# Altium PCB 接收端V02.PcbDoc
Units mil, origin at the board's own origin, x right, y up, seen from the top; angles counter-clockwise.
Board outline 3947.53 x 3949.03 mil, 2 copper layers (Top Layer, Bottom Layer); 78 components, 36 nets, 205 pads, 3 vias.
Unrouted connection lines stored in the file: 2.
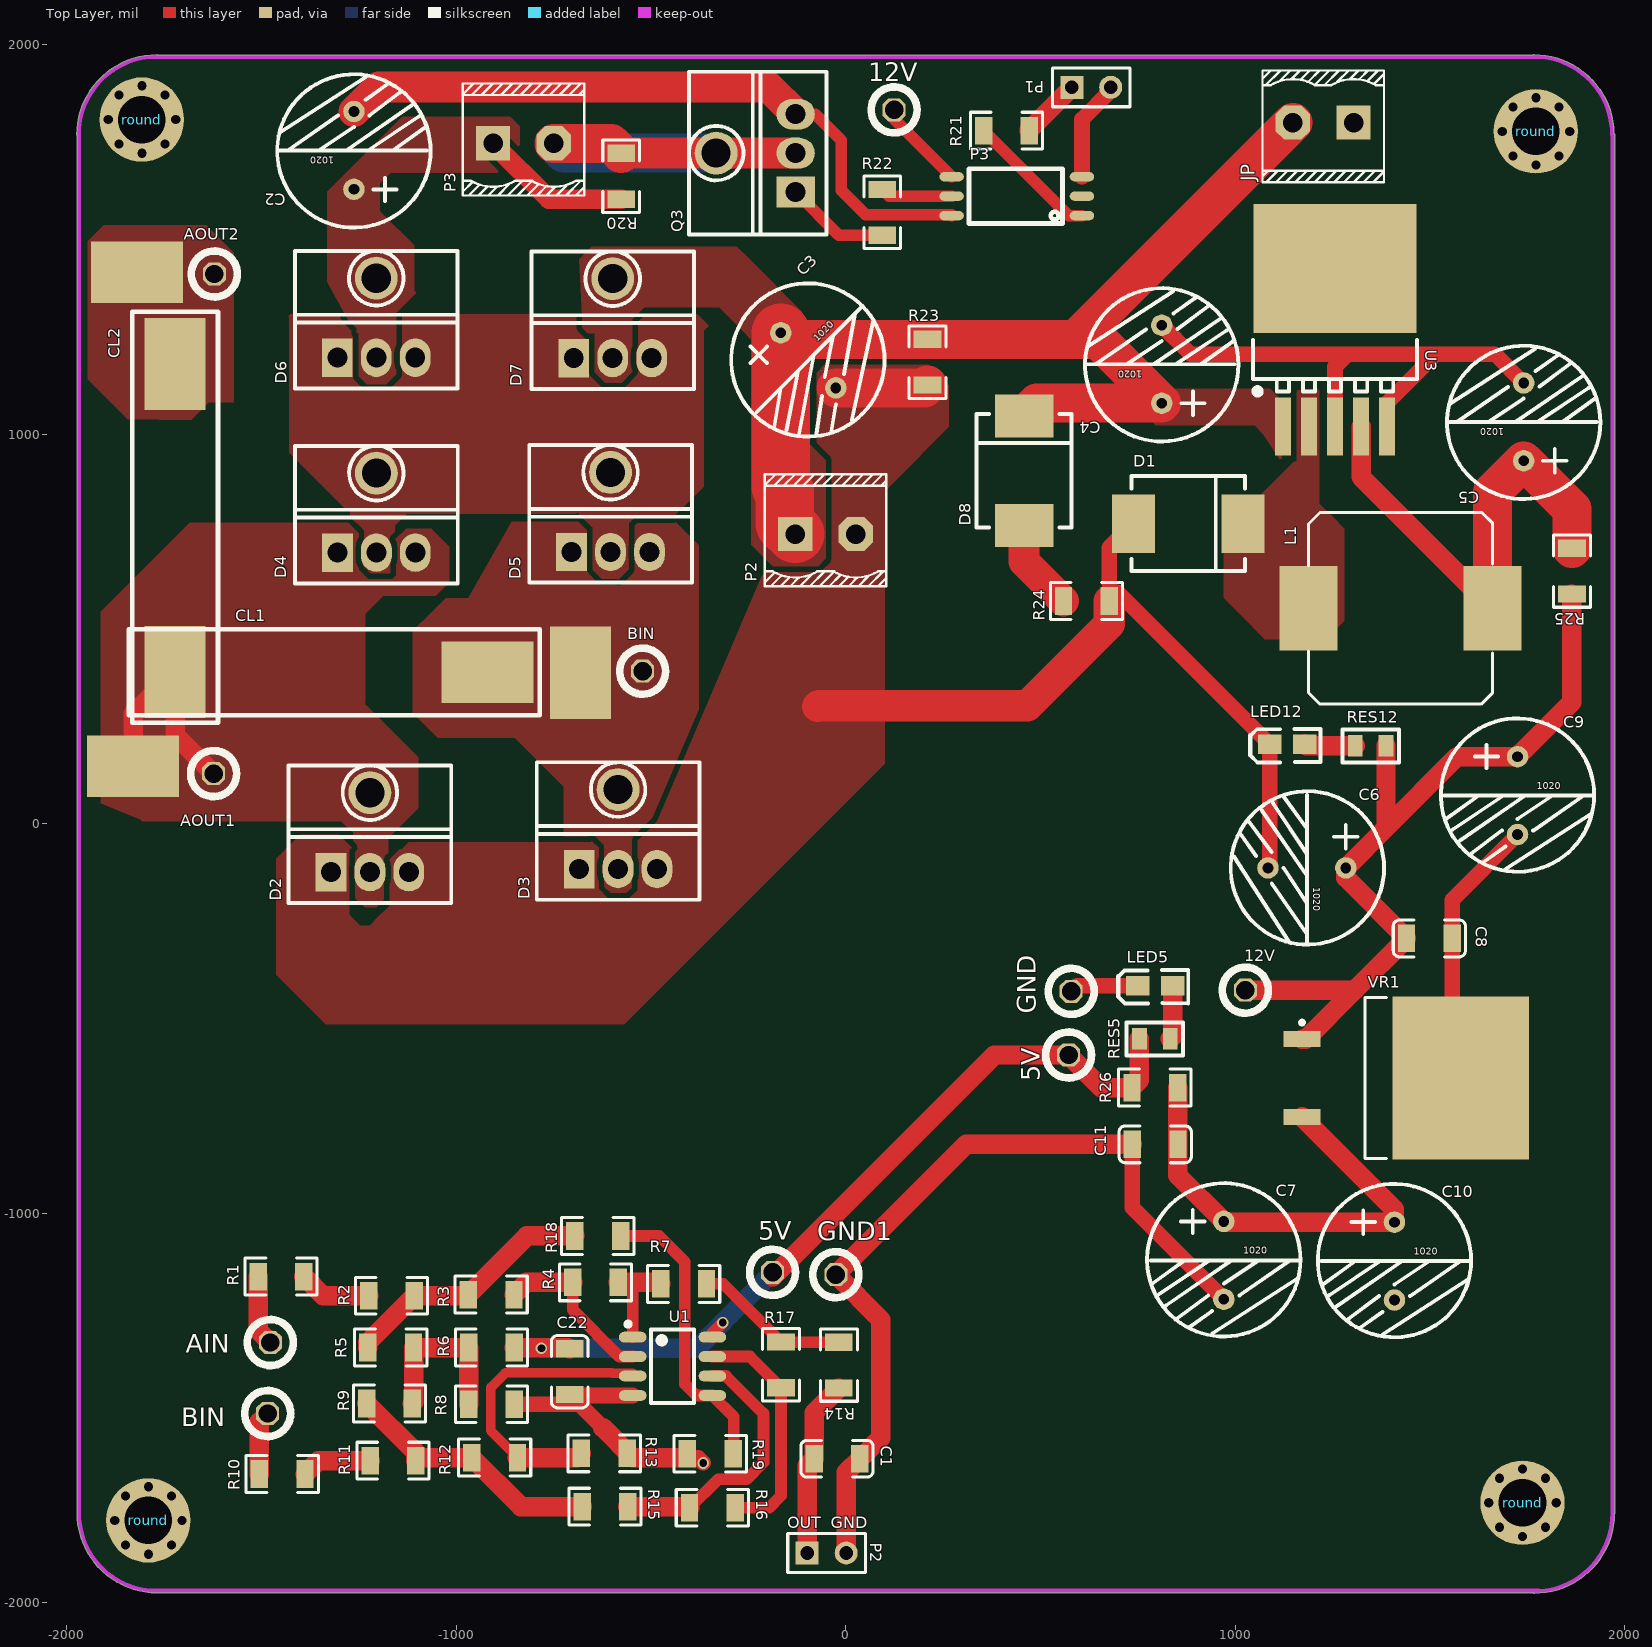
[diagram p0: Top Layer view]
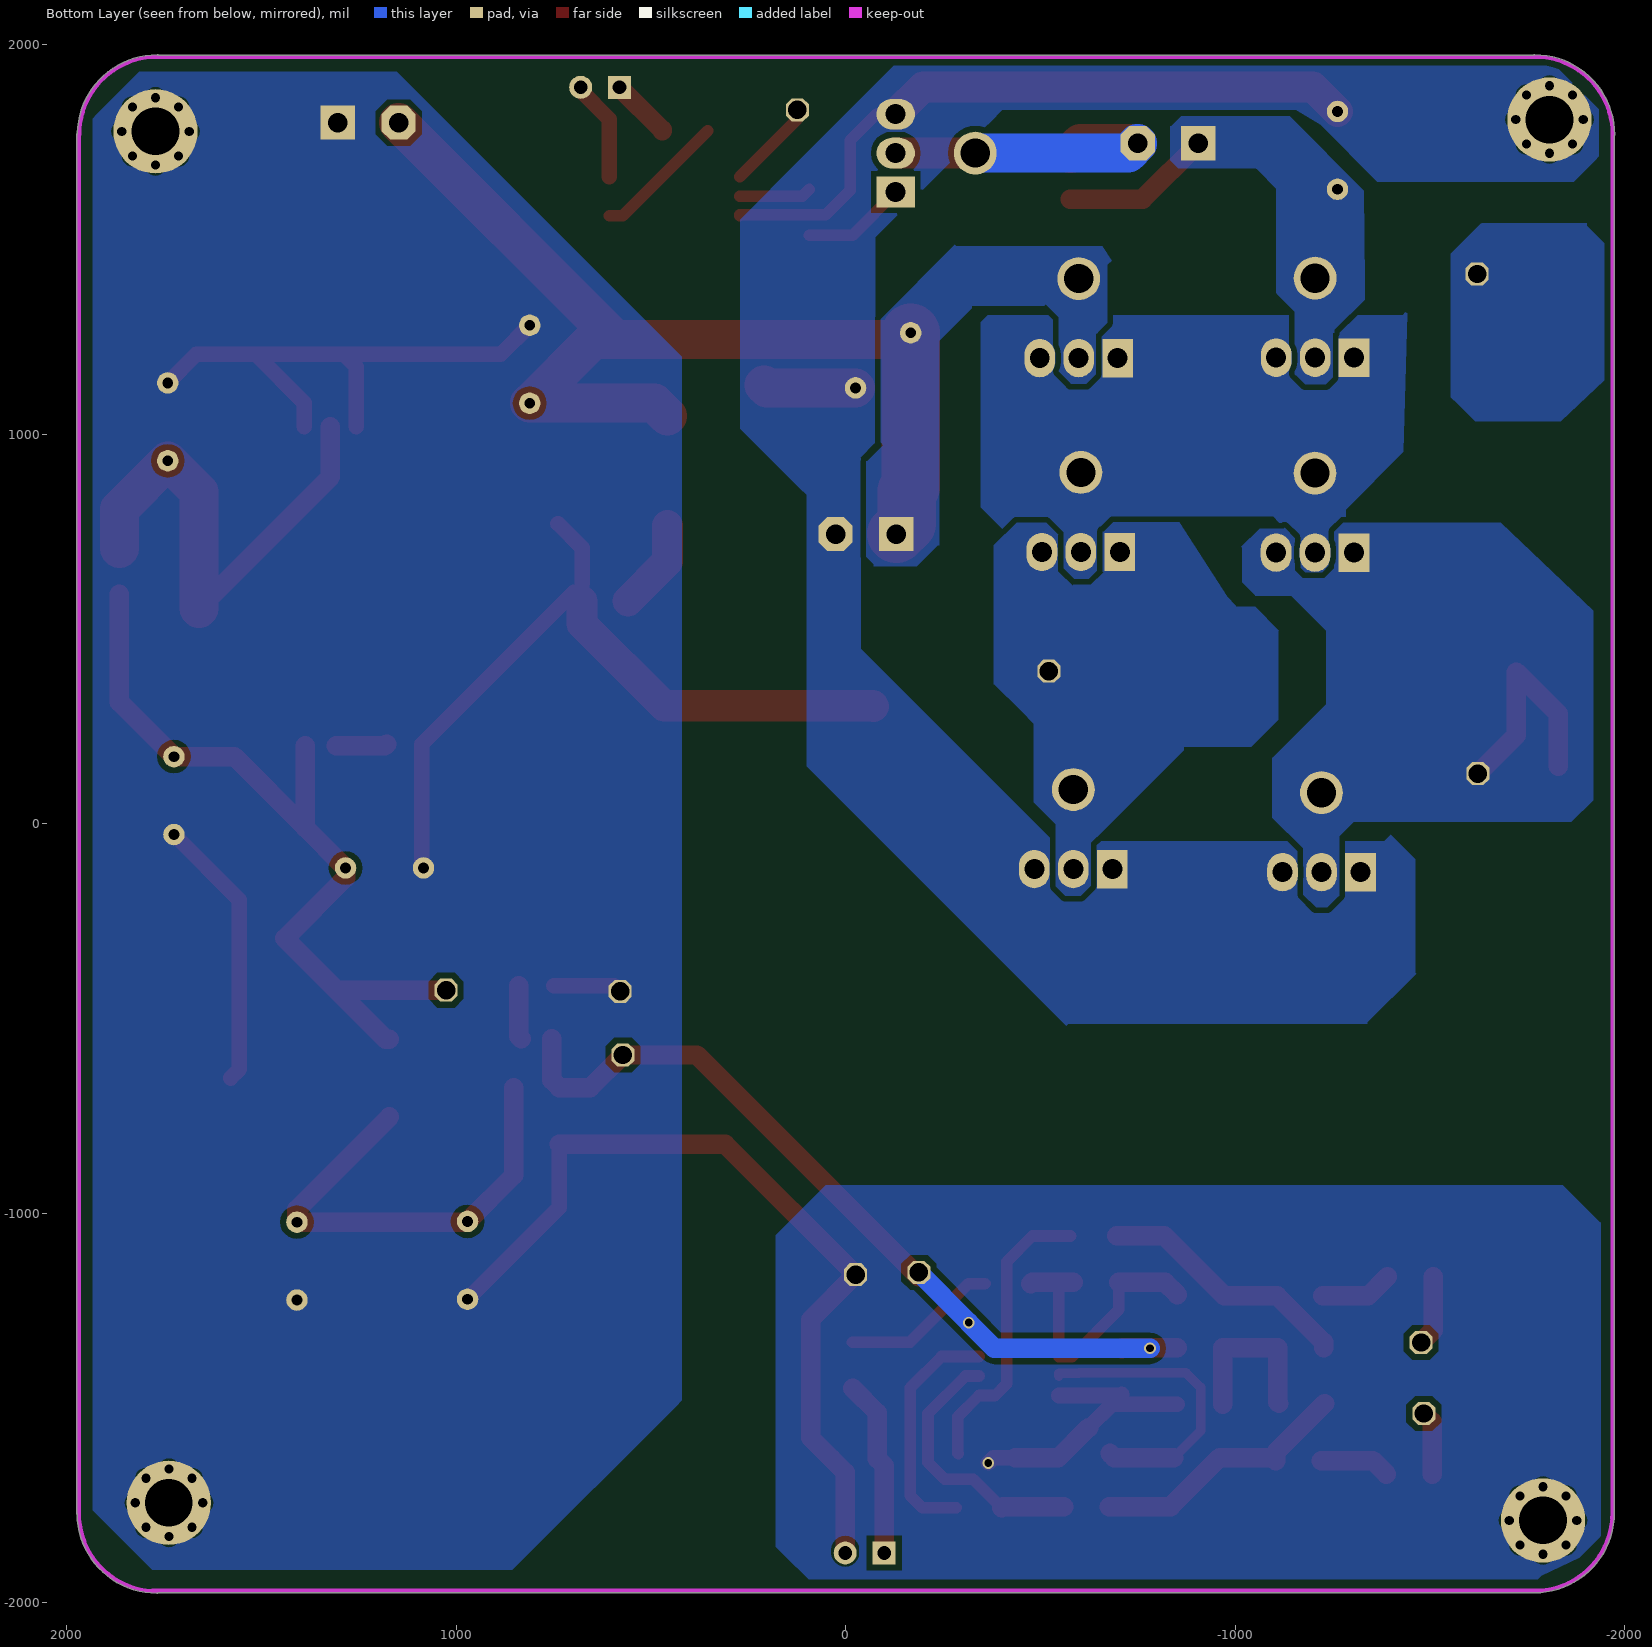
[diagram p1: Bottom Layer view, seen from below]
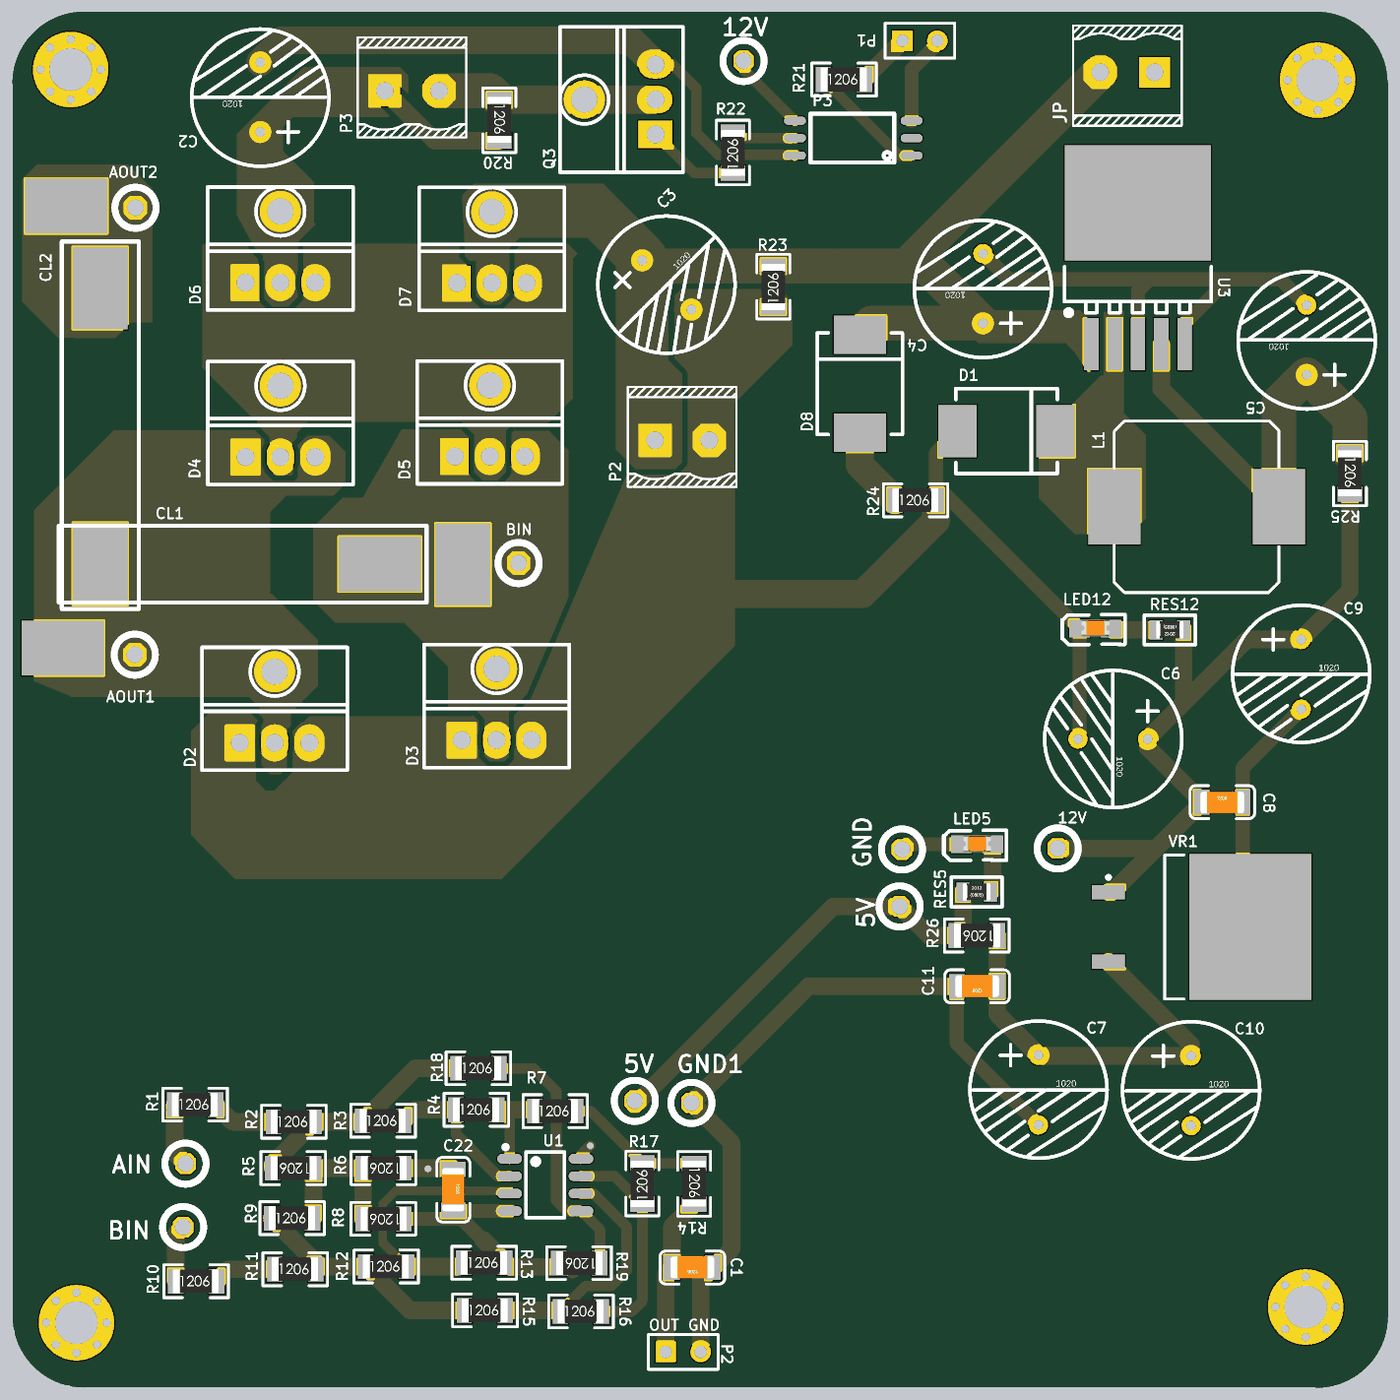
[diagram p2: 3D render of the assembled board from above, using the file's embedded part models]

## Layer stack, top to bottom
Top Solder: solder mask 0.4, Solder Resist, Dk 3.5
Top Layer: signal copper 1.4
Dielectric1: dielectric 12.6, FR-4, Dk 4.8
Bottom Layer: signal copper 1.4
Bottom Solder: solder mask 0.4, Solder Resist, Dk 3.5

## Board outline
-1973.52,-1769 -1973.52,1766.83 cw(c-1969,1769) -1974.01,1769 cw(c-1769,1769) -1769,1974.01 cw(c-1769,1969) -1766.83,1973.52 1764.83,1973.52 cw(c1767,1969) 1767,1974.01 cw(c1767,1769) 1971.98,1772.61 cw(c1968.5,1769) 1973.52,1769 1973.52,-1770 cw(c1968.5,-1770) 1973,-1772.22 cw(c1768,-1770) 1768,-1975.01 cw(c1768,-1970) 1764.43,-1973.52 -1766.33,-1973.52 cw(c-1768.5,-1969) -1768.5,-1974.01 cw(c-1768.5,-1769)

## Design rules (kind name [scope] priority, off if disabled: settings)
Clearance [All] p1: gap=15
PlaneConnect [All] p1: planeconnectstyle=Relief reliefexpansion=20 reliefentries=4 reliefconductorwidth=15 reliefairgap=15
PolygonConnect [All] p1: connectstyle=Direct reliefconductorwidth=10 reliefentries=4 polygonreliefangle="90 Angle" airgapwidth=10
RoutingVias [All] p1: holewidth=28 width=50 viastyle="Through Hole" minholewidth=28 minwidth=50 maxholewidth=28 maxwidth=50
SilkToSolderMaskClearance SilkscreenOverComponentPads [IsPad] p1: minsilkscreentomaskgap=10 clearancetoexposedcopper=TRUE
SolderMaskExpansion [All] p1: expansion=4
Width [All] p1: maxlimit=500 minlimit=25 preferedwidth=50
28 further rules are at their usual default settings.

## Classes and differential pairs
component class MAXRTBV01: 5V 12V AIN AOUT1 AOUT2 BIN C1 C2 C3 C4 C5 C6 C7 C8 C9 C10 C11 CL1 CL2 D1 D2 D3 D4 D5 D6 D7 D8 JP L1 LED5 LED12 P1 P2 P3 Q3 R1 R2 R3 R4 R5 R6 R7 R8 R9 R10 R11 R12 R13 R14 R15 R16 R17 R18 R19 R20 R21 R22 R23 R24 RES5 RES12 round U1 U3 VR1

## Components (designator, comment, footprint, x,y, rotation, side; value= is the part's Value field where it differs from the comment)
5V "text" JET 571.85,-593.5 r180 top (schematic designator text4)
5V "text" JET -187.99,-1151.57 r90 top (schematic designator text3)
12V "text" JET 124.02,1832.68 r90 top (schematic designator text4)
12V "text" JET 1025.59,-427.17 r90 top (schematic designator text5)
AIN "AIN" JET -1477.36,-1331.69 r0 top
AOUT1 "Header2.54X2" JET -1623.03,128.94 r90 top
AOUT2 "Header2.54X2" JET -1621.06,1411.42 r270 top
BIN "AIN" JET -1484.25,-1513.78 r180 top
BIN "AIN" JET -521.65,391.73 r90 top (schematic designator BIN2)
C1 "100nF (104) 10% 50V" 1206_C -22.64,-1629.92 r180 top
C2 "Cap Pol2" 电解电容直插 -1262.76,1829.76 r270 top
C3 "Cap Pol2" C1020 -24.89,1118.34 r135 top
C4 "Cap Pol2" C1020 811.06,1280.75 r270 top
C5 "Cap Pol2" C1020 1740.2,1132.91 r270 top
C6 "Cap Pol2" C1020 1082.64,-113.15 r0 top
C7 "Cap Pol2" C1020 970.43,-1221.69 r90 top
C8 "Cap Pol2" 1206_C 1498.03,-294.29 r0 top
C9 "Cap Pol2" 电解电容直插 1724.37,-28.58 r90 top
C10 "Cap Pol2" 电解电容直插 1408.43,-1223.66 r90 top
C11 "Cap Pol2" 1206_C 794.29,-822.83 r180 top
C22 "100nF (104) 10% 50V" 1206_C -708.66,-1406.5 r270 top (schematic designator C1)
CL1 "谐振电容" DSMC82#1 -1754.31,392.94 r0 top
CL2 "谐振电容" DSMC82#2 -1725.94,346.35 r90 top
D1 "SS510" SMC(DO-214AB)_S1 878.94,770.67 r180 top
D2 "肖特基二极管" TO-220(带散热片) -1228,-120 r90 top
D3 "肖特基二极管" TO-220(带散热片) -591,-112 r90 top
D4 "肖特基二极管" TO-220(带散热片) -1211.34,700.25 r90 top
D5 "肖特基二极管" TO-220(带散热片) -610.34,702 r90 top
D6 "肖特基二极管" TO-220(带散热片) -1211.61,1200.79 r90 top
D7 "肖特基二极管" TO-220(带散热片) -604.76,1199.61 r90 top
D8 "D Schottky" SMC(DO-214AB)_S1 457.68,906.5 r270 top
GND "text" JET 578.74,-430.12 r180 top
GND1 "text" JET -25.59,-1157.48 r90 top
JP "12VIN" 接线端子直插 1233.54,1791.2 r0 top
L1 "Inductor" H4.7UH 1187.99,553.15 r90 top
LED5 "LED_0805" LED_0805 839.02,-415.35 r180 top
LED12 "LED_0805" LED_0805 1178.58,203.74 r180 top
P1 "Header 2" HDR1X2 580.12,1890.75 r0 top
P2 "Header 2" 接线端子直插 -60.04,752.95 r180 top
P2 "Header 2" HDR1X2 -99.02,-1872.05 r0 top (schematic designator P5)
P3 "Header 2" 接线端子直插 -835.63,1755.91 r180 top
P3 "TLP701" SOIC_6 606.3,1561.22 r90 top (schematic designator P4)
Q3 "IBP60R190" TO-220(带散热片) -132.87,1715.55 r180 top
R1 "402KΩ (1003) ±1%" 1206_R -1449.8,-1162.4 r0 top
R2 "300KΩ (1003) ±1%" 1206_R -1166.34,-1211.61 r0 top
R3 "25KΩ (1003) ±1%" 1206_R -910.43,-1208.66 r0 top
R4 "806KΩ (1003) ±1%" 1206_R -642.72,-1177.17 r0 top
R5 "500Ω (1003) ±1%" 1206_R -1168.31,-1344.49 r180 top
R6 "0Ω (1003) ±1%" 1206_R -909.45,-1344.49 r180 top
R7 "150KΩ (1003) ±1%" 1206_R -416.34,-1181.1 r0 top
R8 "0Ω (1003) ±1%" 1206_R -909.45,-1490.16 r180 top
R9 "500Ω (1003) ±1%" 1206_R -1171.26,-1488.19 r0 top
R10 "402KΩ (1003) ±1%" 1206_R -1446.85,-1669.29 r0 top
R11 "300KΩ (1003) ±1%" 1206_R -1162.4,-1634.84 r0 top
R12 "25KΩ (1003) ±1%" 1206_R -901.57,-1626.97 r0 top
R13 "806KΩ (1003) ±1%" 1206_R -620.08,-1616.14 r0 top
R14 "10KΩ (1003) ±1%" 1206_R -17.72,-1389.76 r270 top
R15 "25KΩ (1003) ±1%" 1206_R -618.11,-1752.95 r0 top
R16 "806KΩ (1003) ±1%" 1206_R -342.52,-1755.91 r0 top
R17 "150KΩ (1003) ±1%" 1206_R -166.34,-1388.78 r90 top
R18 "25KΩ (1003) ±1%" 1206_R -636.81,-1058.07 r0 top
R19 "806KΩ (1003) ±1%" 1206_R -348.03,-1617.13 r180 top
R20 "Res3" 1206_R -576.77,1662.4 r270 top
R21 "Res2" 1206_R 412.4,1779.53 r0 top
R22 "Res2" 1206_R 93.5,1569.88 r90 top
R23 "Res3" 1206_R 209.65,1185.04 r90 top
R24 "Res2" 1206_R 617.72,571.85 r0 top
R25 "Res2" 1206_R 1864.17,648.62 r270 top
R26 "Res2" 1206_R 793.31,-677.17 r180 top
RES5 "RES_0805" 0805_R 793.31,-552.17 r0 top
RES12 "RES_0805" 0805_R 1347.44,199.8 r180 top
round "round" M3 1771.65,1777.56 r90 top
round "round" M3 1737.2,-1743.11 r90 top (schematic designator round3)
round "round" M3 -1790.35,-1788.39 r90 top (schematic designator round2)
round "round" M3 -1807,1808 r90 top (schematic designator round1)
U1 "RS722/SOIC-8" SOIC-8_150mil -444.88,-1392.72 r270 top
U3 "LM2596SX-12" TO-263-5 1255.91,1019.69 r270 top
VR1 "LM7805" D2PAK_N 1438.98,-652.56 r0 top

## Footprints (in the part's own frame and the unit in brackets; to place one, negate y for a bottom-side part, rotate by r counter-clockwise, add the part's x,y. Pads: shape width x height; smd on the part's side, far side on the other; paste and mask are expansions set on the pad)
0805_R [mm]
  rect 0.95x1.4 smd: 1(-1,0) 2(1,0)
  silkscreen extent -1.85,-1.08 1.85,1.08, body extent -1,-0.62 1,0.63, height 0.45
1206_C [mm]
  rect 1.13x1.8 smd: 1(-1.49,0) 2(1.49,0)
  silkscreen extent -2.36,-1.2 2.35,1.2, body extent -1.6,-0.81 1.6,0.79, height 1
1206_R [mm]
  rect 1.13x1.8 smd: 1(-1.49,0) 2(1.49,0)
  silkscreen extent -2.36,-1.2 2.35,1.2, body extent -1.7,-0.86 1.65,0.87, height 0.85
C1020 [mm] "1000UF/25V\\470UF/16V"
  round 1.4 hole 0.7: 1(5.106,-0.001) 2(0.026,-0.001)
  silkscreen extent -2.4,-5 7.6,5
D2PAK_N [mm] "D2-PAK, 4-Leads, Body 8.8x10.4mm, Pitch 2.54mm, Lead Span 15.1mm, IPC Medium Density"
  rect 2.4x1.05 smd: 1(-6.8,2.54) 3(-6.8,-2.54)
  rect 8.9x10.65 smd: 2(3.55,0)
  silkscreen extent -6.92,-5.25 -1.3,5.25, body extent -2.7,-5.28 6.3,5.28, height 4.69
DSMC82#1 [mm]
  rect 0x0 smd: 1(1.1,-0.1)
  rect 6x4 smd: 2(21.2,-0.1)
  silkscreen extent -2.2,-2.9 24.6,2.7
DSMC82#2 [mm]
  rect 6x4 smd: 1(1.1,-0.1) 2(21.2,-0.1)
  silkscreen extent -2.2,-2.9 24.6,2.7
H4.7UH [mm]
  rect 5.5x3.8 smd: 1(0,0) 2(0,-12)
  silkscreen extent -6.25,-12 6.25,0
HDR1X2 [mm] "Connector; Header; 2 Position"
  rect 1.5x1.5 hole 0.9: 1(0,0)
  round 1.5 hole 0.9: 2(2.54,0)
  silkscreen extent -1.27,-1.27 3.81,1.27
JET [mm]
  oct 1.5x1.5 hole 1.2: 1(0,0)
  silkscreen extent -1.5,-1.5 1.5,1.5
LED_0805 [mil]
  rect 60x50 smd: 1(0,0) 2(90,0)
  silkscreen extent -40,-40 140,46, body extent 5,-27 85,23, height 43
M3 [mm]
  round 0.6 hole 0.6: 1(-2.2,0) 1(-1.6,1.5) 1(-1.6,-1.5) 1(0,2.2) 1(0,-2.2) 1(1.6,1.5) 1(1.6,-1.5) 1(2.2,0)
  round 5.5 hole 3.1: 1(0,0)
SMC(DO-214AB)_S1 [mil]
  rect 110x150 smd: 1(140.49,0) 2(-140.49,0)
  silkscreen extent -146,-122 146,122
SOIC-8_150mil [mm]
  oval 0.7x1.8 smd: 1(-1.905,-2.6) 2(-0.635,-2.6) 3(0.635,-2.6) 4(1.905,-2.6) 5(1.905,2.6) 6(0.635,2.6) 7(-0.635,2.6) 8(-1.905,2.6)
  silkscreen extent -2.9,-3.05 2.4,1.4
SOIC_6 [mm]
  oval 0.6x1.6 smd: 1(0,0) 2(1.27,0) 3(2.54,0) 4(2.54,8.5) 5(1.27,8.5) 6(0,8.5)
  silkscreen extent -0.51,1.27 3.05,7.37
TO-220(带散热片) [mm]
  rect 2.5x2 hole 1.3: 1(-0.108,2.379)
  oval 2.5x2 hole 1.3: 2(-0.108,-0.161) 3(-0.108,-2.701)
  round 2.794 hole 1.905: 2(5.08,-0.161)
  silkscreen extent -2.11,-5.46 6.86,5.14
TO-263-5 [mm]
  rect 8.4x10.65 smd: 0(-10.3,0)
  rect 3.8x1.05 smd: 1(0,-3.4) 2(0,-1.7) 3(0,0) 4(0,1.7) 5(0,3.4)
  silkscreen extent -5.65,-5.35 -2.1,5.35
接线端子直插 [mil]
  rect 88x88 hole 50: 1(70,9)
  oct 88x88 hole 50: 2(-85.91,9)
  silkscreen extent -164,-145 148,143, body extent -167,-148 151,146, height 559
电解电容直插 [mm] "1000UF/25V\\470U"
  round 1.4 hole 0.7: 1(5.106,-0.001) 2(0.026,-0.001)
  silkscreen extent -2.4,-5 7.6,5

## Part data
5V 5V 12V 12V AIN BIN BIN GND GND1 round round round round: library part Header2.54X2
C1 C22: library part "1206 100nF (104) 10% 50V", "贴片电容"
C2 C3 C4 C5 C6 C7 C8 C9 C10 C11: "Polarized Capacitor (Axial)"
D1: library part "D Schottky", "Schottky Diode"
D8: "Schottky Diode"
JP: library part "Header 2", "Header, 2-Pin"
LED5 LED12: "发光LED，0805封装"
P1 P2 P2 P3: "Header, 2-Pin"
P3: library part "Header 3X2A", "Header, 3-Pin, Dual row"
Q3: library part MOSFET-N, "N-Channel MOSFET"
R1 R2 R3 R4 R5 R6 R7 R8 R9 R10 R11 R12 R13 R14 R15 R16 R17 R18 R19: library part "1206 100KΩ (1003) 1%", "贴片电阻"
R20 R21 R22 R23 R24 R25 R26: "Resistor"
RES5 RES12: "贴片电阻，0805封装"
U1: library part NE5532DR_[C7426], "功放"
U3: library part LM2596SX-5.0/NOPB_[C10002], "DC-DCоƬ"
VR1: library part "Volt Reg", "Voltage Regulator"

## Free pads (board coordinates)
  rect 236.22x157.48 smd: 0(-1829.72,147.64) 0(-1819.88,1416.34)
  rect 157.48x236.22 smd: 0(-681.1,387.8)

## Via types
v1: diameter 30, hole 20, Top Layer to Bottom Layer, tented both sides, 3 vias

## Nets (pads, with @x,y where several pads share a name; then routed paths per layer and width w, separated by ;. In a path a pad name is that pad's centre, name@x,y a point inside that pad or via, vN(x,y) a via of type N, cw(c..) or ccw(c..) an arc to the next point about the centre after c; other vN are vias at no path point)
AIN: AIN.1 R1.1 | length 182.2
  Top Layer w50: R1.1 -1508.46,-1300.59 AIN.1
AIN_1: AOUT1.1 CL1.1 CL2.1 D2.2 D4.1 D4.3 pad.0@-1829.72,147.64 | length 588.4
  Top Layer w50: pad.0@-1829.72,147.64 -1829.72,281.94 CL2.1 -1722,227.91 AOUT1.1
BIN: BIN.1@-521.65,391.73 CL1.2 D3.2 D5.1 D5.3 pad.0@-681.1,387.8
DATA: P1.1 R21.2 | length 156.4
  Top Layer w50: R21.2 471.06,1781.69 P1.1
GND: C1.1 C2.2 C3.2 C4.2 C5.2 C6.2 C7.2 C8.2 C9.2 C10.2 C11.2 C22.2 D1.1 D2.1 D2.3 D3.1 D3.3 GND1.1 GND.1 JP.1 LED5.2 LED12.2 P2.2 P3.6 Q3.3 R8.1 R13.2 R19.2 R23.1 R24.2 round.1@1737.2,-1743.11 round.1@1771.65,1777.56 round.1@-1790.35,-1788.39 round.1@-1807,1808 U1.4 U3.3 U3.5 VR1.2 | length 9178.1
  Top Layer w30: Q3.3 -78.78,1821.89 -11.81,1754.92 -11.81,1625.98 50.71,1563.46 271.65,1563.46 P3.6
  Top Layer w40: R8.1 -683.66,-1490.16 -623.82,-1550 ; C22.2 -706.1,-1467.72 U1.4 ; -436.02,-1627.95 -378.94,-1627.95 v1(-366.14,-1640.75) ; GND.1 593.5,-415.35 LED5.2 ; 676.38,615.94 676.38,708.6 D1.1 ; R24.2@698.43,593.9 LED12.2 1088.58,-108.27 C6.2 ; C11.2 735.63,-985.83 C7.2 ; C4.2 885.04,1205.71 1288.39,1205.71 ; U3.3 1255.91,1173.23 1288.39,1205.71 ; U3.5 1389.76,1080.71 1514.76,1205.71 ; VR1.2 1556.69,-630.51 C8.2 1556.69,-195.28 C9.2 ; C5.2 1666.34,1205.71 1514.76,1205.71 ; 1288.39,1205.71 1514.76,1205.71
  Top Layer w50: -623.82,-1550 -545.87,-1627.95 -436.02,-1627.95 ; P2.2@0.98,-1872.05 0.98,-1664.96 C1.1 89.57,-1576.38 89.57,-1272.64 GND1.1 309.06,-822.83 C11.2
  Top Layer w80: C2.2 -1199.8,1891.73 -198.46,1891.73 Q3.3 ; -71.85,301.18 -69.88,303.15 466.54,303.15 676.38,512.99 R24.2
  Top Layer w100: C3.2 202.36,1119.09 R23.1
  Bottom Layer w40: P2.2@0.98,-1872.05 P2.2@0.98,-1863.49
GND1: P1.2 P3.3 | length 260.1
  Top Layer w40: P3.3 606.3,1808.38 680.12,1882.2 P1.2
MAINVOUT: C3.1 C4.1 D7.2 D8.2 JP.2 P2.1@-130.04,743.95 R23.2 U3.1 | length 2738.7
  Top Layer w100: C3.1 -150.2,1243.7 R23.2 591.14,1243.7 ; D8.2 490.41,1079.72 C4.1 647.05,1243.7 591.14,1243.7 ; JP.2 591.14,1243.7
  Top Layer w150: C3.1 -167.01,864.85 -156.5,854.33 -156.5,770.41 P2.1@-130.04,743.95
NetAOUT2_1: AOUT2.1 CL2.2 pad.0@-1819.88,1416.34
NetBIN_1: BIN.1@-1484.25,-1513.78 R10.1 | length 164.3
  Top Layer w50: R10.1 -1505.51,-1535.04 BIN.1@-1484.25,-1513.78
NetC2_1: C2.1 D6.2 P3.1@-905.63,1746.91 R20.2 | length 388.2
  Top Layer w50: P3.1@-905.63,1746.91 -762.46,1603.74 R20.2
NetC5_1: C5.1 L1.2 R25.1 U3.4 | length 1294.1
  Top Layer w50: U3.4 1322.83,890.75 L1.2
  Top Layer w100: L1.2 1660.43,852.17 C5.1 1864.17,807.87 R25.1
NetC7_1: C7.1 C10.1 C11.1 R26.1 VR1.3 | length 1199.7
  Top Layer w50: R26.1 851.97,-902.17 C7.1 972.44,-1022.64 C10.1 1408.46,-989.76 VR1.3
NetD1_2: D1.2 L1.1 U3.2
NetD4_2: D4.2 D5.2 D6.1 D6.3 D7.1 D7.3
NetD8_1: D8.1 R24.1 | length 236.1
  Top Layer w80: D8.1 457.68,673.23 R24.1
NetLED5_1: LED5.1 RES5.2 | length 139.4
  Top Layer w50: RES5.2 839.02,-545.83 LED5.1
NetLED12_1: LED12.1 RES12.2 | length 131.1
  Top Layer w50: LED12.1 1182.52,199.8 RES12.2
NetP3_1: P3.1@606.3,1561.22 R21.1 | length 343
  Top Layer w30: R21.1 572.05,1561.22 P3.1@606.3,1561.22
NetP3_2: P3.2@-749.72,1746.91 Q3.2 R20.1 | length 1059.4
  Top Layer w80: R20.1 -575.94,1721.89 -332.87,1721.89 Q3.2@-128.62,1721.89
  Top Layer w100: P3.2@-749.72,1746.91 -602.61,1746.91 R20.1
  Bottom Layer w100: P3.2@-749.72,1746.91 -724.71,1721.89 Q3.2@-332.87,1721.89
NetP3_5: P3.5 R22.2 | length 185.3
  Top Layer w30: R22.2 110.83,1611.22 P3.5
NetQ3_1: Q3.1 R22.1 | length 268
  Top Layer w30: Q3.1 -17.95,1511.22 R22.1
NetR1_2: R1.2 R2.1 | length 186.5
  Top Layer w50: R1.2 -1341.93,-1211.61 R2.1
NetR2_2: R2.2 R3.1 R5.2 R18.1 | length 658.1
  Top Layer w50: R5.2 -1226.97,-1330.91 R2.2 -972.05,-1211.61 R3.1 -818.5,-1058.07 R18.1
NetR3_2: R3.2 R4.1 U1.2 | length 437.7
  Top Layer w30: R4.1 -701.38,-1247.44 -581.1,-1367.72 U1.2
  Top Layer w50: R3.2 -820.28,-1177.17 R4.1
NetR4_2: R4.2 R7.1 U1.1 | length 252.5
  Top Layer w30: U1.1 -547.24,-1180.12 -544.29,-1177.17
  Top Layer w50: R4.2 -544.29,-1177.17 -478.94,-1177.17 R7.1
NetR5_1: R5.1 R6.2 R8.2 R9.2 | length 432.1
  Top Layer w50: R9.2 -1109.65,-1485.24 R5.1 R6.2 R8.2
NetR7_2: R7.2 R14.1 R17.2 | length 401.7
  Top Layer w30: R7.2 -315.35,-1181.1 R17.2 ; R17.2@-166.34,-1331.1 R14.1
NetR9_1: R9.1 R11.2 R12.1 R15.1 | length 681.3
  Top Layer w50: R9.1 -1103.74,-1614.37 R11.2 -1095.87,-1626.97 R12.1 -834.25,-1752.95 R15.1
NetR10_2: R10.2 R11.1 | length 181.4
  Top Layer w50: R10.2 -1353.74,-1634.84 R11.1
NetR12_2: R12.2 R13.1 U1.3 | length 764.6
  Top Layer w25: R12.2 -911.42,-1558.46 -911.42,-1446.85 -874.02,-1409.45 -599.47,-1409.45 -598.71,-1410.22 -547.24,-1410.22 -547.24,-1415.41 U1.3
  Top Layer w50: R12.2 -689.57,-1626.97 R13.1
NetR15_2: R15.2 R16.1 U1.6 | length 693.9
  Top Layer w30: R16.1 -327.83,-1682.56 -254.7,-1682.56 -211.34,-1639.2 -211.34,-1514.06 -307.68,-1417.72 U1.6
  Top Layer w50: R15.2 -404.13,-1752.95 R16.1
NetR16_2: R16.2 R17.1 U1.7 | length 617.3
  Top Layer w30: U1.7 -246.06,-1367.72 R17.1 -166.34,-1725.39 -196.85,-1755.91 R16.2
NetR18_2: R18.2 R19.1 U1.5 | length 762
  Top Layer w30: R18.2 -479.33,-1058.07 -413.39,-1124.02 -413.39,-1437.99 -383.66,-1467.72 U1.5 -287.8,-1522.44 -287.8,-1615.55 R19.1
VCC5V: 5V.1 C22.1 R6.1 R26.2 RES5.1 U1.8 | length 2204.4
  Top Layer w30: U1.8 -342.52,-1307.09 v1(-315.94,-1280.51)
  Top Layer w50: R6.1 -712.01,-1344.49 C22.1 ; 5V.1@-187.99,-1151.57 -187.99,-1163.19 381.69,-593.5 571.85,-593.5 655.51,-677.17 R26.2 753.94,-657.87 RES5.1
  Bottom Layer w50: v1(-781.5,-1346.46) -381.89,-1346.46 v1(-315.94,-1280.51) -315.94,-1279.53 5V.1@-187.99,-1151.57
VCC12V: 12V.1 C6.1 C8.1 C9.1 P3.4 R25.2 RES12.1 VR1.1 | length 2378.5
  Top Layer w30: 12V.1@124.02,1832.68 124.02,1808.86 P3.4
  Top Layer w50: 12V.1@1025.59,-427.17 1306.5,-427.17 ; VR1.1 1181.1,-552.56 1306.5,-427.17 ; RES12.1 1386.81,-10.04 ; R25.2 1864.17,312.2 C9.1 1569.29,172.44 1386.81,-10.04 ; 1306.5,-427.17 C8.1 1283.66,-138.58 C6.1 1386.81,-10.04
VSINOUT: C1.2 P2.1@-99.02,-1872.05 R14.2 | length 457.3
  Top Layer w50: P2.1@-99.02,-1872.05 -99.02,-1647.64 C1.2 -81.3,-1512.01 R14.2
pads on no net: P3.2@606.3,1611.22 round.1@1650.59,-1743.11 round.1@1678.15,-1680.12 round.1@1678.15,-1806.1 round.1@1685.04,1777.56 round.1@1712.6,1714.57 round.1@1712.6,1840.55 round.1@1737.2,-1656.5 round.1@1737.2,-1829.72 round.1@1771.65,1690.94 round.1@1771.65,1864.17 round.1@1796.26,-1680.12 round.1@1796.26,-1806.1 round.1@1823.82,-1743.11 round.1@1830.71,1714.57 round.1@1830.71,1840.55 round.1@1858.27,1777.56 round.1@-1703.74,-1788.39 round.1@-1720.39,1808 round.1@-1731.3,-1725.39 round.1@-1731.3,-1851.38 round.1@-1747.94,1745.01 round.1@-1747.94,1870.99 round.1@-1790.35,-1701.77 round.1@-1790.35,-1875 round.1@-1807,1721.39 round.1@-1807,1894.61 round.1@-1849.41,-1725.39 round.1@-1849.41,-1851.38 round.1@-1866.06,1745.01 round.1@-1866.06,1870.99 round.1@-1876.97,-1788.39 round.1@-1893.61,1808 U3.0

## Polygon pours and split planes (outlines as drawn)
NetAOUT2_1 on Top Layer "Top Layer-No Net" (solid, remove dead copper, pour order 22): -1681.1,1036.42 -1634.84,1082.68 -1571.85,1082.68 -1571.85,1466.54 -1618.11,1512.8 -1641.73,1536.42 -1847.44,1536.42 -1904.53,1536.42 -1937.99,1502.95 -1945.87,1495.08 -1945.87,1164.37 -1945.87,1140.75 -1843.5,1038.39
MAINVOUT on Top Layer "Top Layer-No Net" (solid, remove dead copper, pour order 52): 1119.09,929.13 1119.09,1085.63 1120.08,1086.61 1089.57,1117.13 1062.01,1117.13 778.54,1117.13 758.86,1097.44 759.84,1096.46 759.84,1063.98 759.84,1059.06 784.45,1034.45 796.26,1022.64 1045.28,1022.64 1049.21,1022.64 1071.85,1000
NetD1_2 on Top Layer "Top Layer-No Net" (solid, remove dead copper, pour order 58): 1215.55,1117.13 1215.55,821.85 1247.05,790.35 1279.53,757.87 1279.53,554.13 1279.53,521.65 1232.28,474.41 1089.57,474.41 1075.79,474.41 1010.83,539.37 970.47,579.72 970.47,854.33 970.47,817.91 1027.56,760.83 1055.12,788.39 1055.12,833.66 1055.12,834.65 1144.69,924.21 1156.5,936.02 1156.5,1113.19
NetC2_1 on Top Layer "Top Layer-No Net" (solid, remove dead copper, pour order 62): -1278.54,1295.28 -1254.92,1271.65 -1254.92,1178.15 -1254.92,1153.54 -1230.31,1128.94 -1229.33,1127.95 -1197.83,1127.95 -1180.12,1127.95 -1159.45,1148.62 -1154.53,1153.54 -1154.53,1222.44 -1154.53,1312.01 -1103.35,1363.19 -1108.27,1368.11 -1108.27,1431.1 -1108.27,1485.24 -1190.94,1567.91 -1196.85,1573.82 -1196.85,1628.94 -1196.85,1642.72 -1177.17,1662.4 -1168.31,1671.26 -1059.06,1671.26 -872.05,1671.26 -838.58,1704.72 -836.61,1706.69 -836.61,1788.39 -836.61,1790.35 -861.22,1814.96 -986.22,1814.96 -1138.78,1814.96 -1324.8,1628.94 -1330.71,1623.03 -1330.71,1391.73
MAINVOUT on Top Layer "Top Layer-No Net" (solid, remove dead copper, pour order 64): -676.18,1302.17 -676.18,1273.62 -646.65,1244.09 -644.68,1242.13 -644.68,1160.43 -644.68,1159.45 -622.05,1136.81 -618.11,1132.87 -587.6,1132.87 -575.79,1132.87 -559.06,1149.61 -548.23,1160.43 -548.23,1245.08 -548.23,1295.28 -524.61,1318.9 -517.72,1325.79 -443.9,1325.79 -324.8,1325.79 -265.75,1266.73 -242.13,1243.11 -242.13,840.55 -242.13,716.54 -190.94,665.35 -187.01,661.42 -131.89,661.42 -70.87,661.42 -66.93,665.35 -51.18,681.1 -51.18,710.63 -51.18,933.07 -98.43,980.31 -103.35,985.24 -103.35,1170.28 -103.35,1305.12 -247.05,1448.82 -279.53,1481.3 -632.87,1481.3 -651.57,1481.3 -684.06,1448.82
GND on Top Layer "Top Layer-No Net" (solid, remove dead copper, pour order 66): -215.55,635.83 -74.8,776.57 -74.8,1158.46 -58.07,1175.2 -55.12,1178.15 211.61,1178.15 212.6,1178.15 265.75,1125 264.76,1124.02 264.76,1025.59 264.76,1018.7 124.02,877.95 99.41,853.35 99.41,598.43 99.41,153.54 -351.38,-297.24 -568.9,-514.76 -893.7,-514.76 -1334.65,-514.76 -1456.69,-392.72 -1461.61,-387.8 -1461.61,-184.06 -1461.61,-89.57 -1419.29,-47.24 -1400.59,-28.54 -1337.6,-28.54 -1301.18,-28.54 -1268.7,-61.02 -1274.61,-66.93 -1274.61,-186.02 -1274.61,-233.27 -1250.98,-256.89 -1246.06,-261.81 -1225.39,-261.81 -1222.44,-261.81 -1199.8,-239.17 -1171.26,-210.63 -1171.26,-95.47 -1171.26,-91.54 -1141.73,-62.01 -1138.78,-64.96 -1093.5,-64.96 -1139.76,-64.96 -1122.05,-47.24 -1121.06,-47.24 -655.51,-47.24 -652.56,-44.29 -634.84,-62.01 -634.84,-67.91 -634.84,-167.32 -617.13,-185.04 -609.25,-192.91 -562.01,-192.91 -557.09,-192.91 -538.39,-174.21 -534.45,-170.28 -534.45,-52.17 -534.45,-43.31 -484.25,6.89
AIN_1 on Top Layer "Top Layer-No Net" (solid, remove dead copper, pour order 68): -1810.04,10.83 -1806.1,6.89 -1317.91,6.89 -1295.28,6.89 -1263.78,-24.61 -1264.76,-25.59 -1264.76,-164.37 -1264.76,-185.04 -1235.24,-214.57 -1222.44,-214.57 -1205.71,-214.57 -1179.13,-187.99 -1175.2,-184.06 -1175.2,-77.76 -1175.2,-37.4 -1110.24,27.56 -1097.44,40.35 -1097.44,253.94 -1097.44,170.28 -1234.25,307.09 -1258.86,307.09 -1235.24,307.09 -1234.25,306.1 -1234.25,523.62 -1234.25,539.37 -1191.93,581.69 -1187.99,585.63 -1059.06,585.63 -1052.17,585.63 -1019.68,618.11 -1017.72,620.08 -1017.72,704.72 -1017.72,711.61 -1051.18,745.08 -1063.98,757.87 -1124.02,757.87 -1128.94,757.87 -1156.5,730.31 -1154.53,728.35 -1154.53,638.78 -1154.53,637.8 -1164.37,627.95 -1203.74,627.95 -1226.38,627.95 -1247.05,648.62 -1250.98,652.56 -1250.98,746.06 -1271.65,766.73 -1277.56,772.64 -1375.98,772.64 -1684.06,772.64 -1896.65,560.04 -1912.4,544.29 -1912.4,53.15
NetD4_2 on Top Layer "Top Layer-No Net" (solid, remove dead copper, pour order 72): -1430.12,1308.07 -381.89,1308.07 -352.36,1278.54 -365.16,1265.75 -365.16,866.14 -365.16,865.16 -409.45,820.87 -443.9,786.42 -540.35,786.42 -542.32,786.42 -554.13,774.61 -557.09,771.65 -557.09,665.35 -557.09,653.54 -583.66,626.97 -585.63,628.94 -619.09,628.94 -625.98,628.94 -645.67,648.62 -651.57,654.53 -651.57,760.83 -651.57,761.81 -688.98,799.21 -691.93,796.26 -1088.58,796.26 -1126.97,796.26 -1149.61,773.62 -1158.46,764.76 -1158.46,679.13 -1158.46,652.56 -1171.26,639.76 -1173.23,637.8 -1226.38,637.8 -1227.36,637.8 -1265.75,676.18 -1271.65,682.09 -1271.65,809.06 -1285.43,809.06 -1320.87,844.49 -1429.13,952.76 -1429.13,1298.23
BIN on Top Layer "Top Layer-No Net" (solid, remove dead copper, pour order 74): -857.28,775.59 -437.99,775.59 -416.34,753.94 -377.95,715.55 -377.95,654.53 -377.95,-61.02 -580.71,-263.78 -724.41,-120.08 -724.41,42.32 -724.41,95.47 -809.06,180.12 -849.41,220.47 -1036.42,220.47 -1047.24,220.47 -1098.43,271.65 -1111.22,284.45 -1111.22,488.19 -1111.22,495.08 -1063.98,542.32 -1027.56,578.74 -924.21,578.74 -969.49,578.74
GND on Bottom Layer "Top Layer-No Net" (solid, remove dead copper, pour order 96): -1786.42,-1930.12 -1776.57,-1939.96 67.91,-1939.96 94.49,-1939.96 154.53,-1879.92 179.13,-1855.32 179.13,-1074.8 179.13,-1056.1 84.65,-961.61 51.18,-928.15 -1780.51,-928.15 -1841.54,-928.15 -1934.06,-1020.67 -1937.99,-1024.61 -1937.99,-1763.78 -1937.99,-1829.72 -1883.86,-1883.86
GND on Bottom Layer "Top Layer-No Net" (solid, remove dead copper, pour order 60): 1599.41,1930.12 1812.99,1930.12 1923.23,1819.88 1933.07,1810.04 1933.07,1581.69 1933.07,-1761.81 1887.8,-1807.09 1779.53,-1915.35 1559.06,-1915.35 855.31,-1915.35 436.02,-1496.06 420.28,-1480.31 420.28,-908.46 420.28,1198.82 1152.56,1931.1
AIN_1 on Bottom Layer "Top Layer-No Net" (solid, remove dead copper, pour order 78): -1682.09,772.64 -1278.54,772.64 -1277.56,772.64 -1258.86,753.94 -1254.92,750 -1254.92,663.39 -1254.92,656.5 -1241.14,642.72 -1229.33,630.91 -1176.18,630.91 -1173.23,630.91 -1154.53,649.61 -1153.54,650.59 -1153.54,730.31 -1153.54,733.27 -1126.97,759.84 -1125,757.87 -1064.96,757.87 -1062.99,757.87 -1015.75,710.63 -1017.72,708.66 -1017.72,622.05 -1017.72,620.08 -1051.18,586.61 -1052.17,585.63 -1145.67,585.63 -1145.67,584.65 -1234.25,496.06 -1234.25,307.09 -1233.27,307.09 -1097.44,171.26 -1095.47,169.29 -1095.47,34.45 -1095.47,15.75 -1174.21,-62.99 -1175.2,-63.98 -1175.2,-160.43 -1175.2,-182.09 -1207.68,-214.57 -1235.24,-214.57 -1236.22,-214.57 -1260.83,-189.96 -1266.73,-184.06 -1266.73,-94.49 -1266.73,-32.48 -1302.17,2.95 -1304.13,4.92 -1509.84,4.92 -1863.19,4.92 -1919.29,61.02 -1919.29,547.24
BIN on Bottom Layer "Top Layer-No Net" (solid, remove dead copper, pour order 80): -856.3,774.61 -687.01,774.61 -662.4,750 -660.43,750 -660.43,647.64 -662.4,645.67 -629.92,613.19 -584.65,613.19 -582.68,611.22 -546.26,647.64 -544.29,647.64 -544.29,741.14 -545.28,742.13 -514.76,772.64 -439.96,772.64 -438.98,772.64 -380.91,714.57 -380.91,358.27 -381.89,358.27 -451.77,288.39 -483.27,256.89 -483.27,130.91 -483.27,55.12 -533.46,4.92 -539.37,-0.98 -539.37,-152.56 -539.37,-160.43 -559.06,-180.12 -563.98,-185.04 -601.38,-185.04 -603.35,-185.04 -626.97,-161.42 -629.92,-158.46 -629.92,-81.69 -629.92,-49.21 -658.46,-20.67 -868.11,188.98 -868.11,197.83 -1041.34,197.83 -1051.18,207.68 -1111.22,267.72 -1111.22,289.37 -1111.22,495.08 -1112.2,496.06 -1051.18,557.09 -1001.97,557.09 -1001.97,560.04 -979.33,582.68
MAINVOUT on Bottom Layer "Top Layer-No Net" (solid, remove dead copper, pour order 82): -683.07,1445.87 -672.24,1435.04 -672.24,1290.35 -672.24,1286.42 -648.62,1262.8 -642.72,1256.89 -642.72,1168.31 -642.72,1154.53 -618.11,1129.92 -577.76,1129.92 -577.76,1130.91 -551.18,1157.48 -547.24,1161.42 -547.24,1257.87 -547.24,1300.2 -513.78,1333.66 -509.84,1329.72 -323.82,1329.72 -323.82,1323.82 -247.05,1247.05 -240.16,1240.16 -240.16,714.57 -236.22,714.57 -187.01,665.35 -183.07,661.42 -71.85,661.42 -71.85,666.34 -53.15,685.04 -53.15,931.1 -55.12,931.1 -96.46,972.44 -89.57,979.33 -89.57,1292.32 -89.57,1295.28 -280.51,1486.22 -283.46,1483.27 -658.46,1483.27
NetC2_1 on Bottom Layer "Top Layer-No Net" (solid, remove dead copper, pour order 84): -1332.68,1390.75 -1332.68,1345.47 -1254.92,1267.72 -1253.94,1266.73 -1253.94,1158.46 -1253.94,1149.61 -1236.22,1131.89 -1232.28,1127.95 -1185.04,1127.95 -1180.12,1127.95 -1160.43,1147.64 -1153.54,1154.53 -1153.54,1293.31 -1153.54,1314.96 -1107.28,1361.22 -1105.31,1363.19 -1105.31,1628.94 -1105.31,1630.91 -1059.06,1677.17 -1053.15,1683.07 -865.16,1683.07 -854.33,1683.07 -833.66,1703.74 -833.66,1790.35 -835.63,1790.35 -859.25,1813.98 -861.22,1815.94 -1137.8,1815.94 -1139.76,1815.94 -1330.71,1625
NetD4_2 on Bottom Layer "Top Layer-No Net" (solid, remove dead copper, pour order 86): -1441.93,1317.91 -1430.12,1306.1 -376.97,1306.1 -365.16,1306.1 -351.38,1292.32 -346.46,1287.4 -346.46,833.66 -346.46,812.99 -567.91,591.54 -572.83,586.61 -644.68,586.61 -657.48,586.61 -718.5,647.64 -738.19,667.32 -738.19,755.91 -743.11,755.91 -774.61,787.4 -776.57,789.37 -1077.76,789.37 -1097.44,789.37 -1153.54,733.27 -1153.54,617.13 -1257.87,617.13 -1262.8,622.05 -1283.46,642.72 -1283.46,750 -1283.46,806.1 -1432.09,954.72
GND on Bottom Layer "Top Layer-No Net" (solid, remove dead copper, pour order 92): -1219.49,1794.29 -1365.16,1648.62 -1446.85,1648.62 -1869.09,1648.62 -1923.23,1702.76 -1934.06,1713.58 -1934.06,1828.74 -1934.06,1834.65 -1837.6,1931.1 -1822.83,1945.87 -1214.57,1945.87 -124.02,1945.87 115.16,1706.69 270.67,1551.18 270.67,1021.65 270.67,1014.76 117.13,861.22 100.39,844.49 100.39,156.5 100.39,147.64 -565.94,-518.7 -571.85,-512.8 -1339.57,-512.8 -1339.57,-509.84 -1464.57,-384.84 -1462.6,-382.87 -1462.6,-91.54 -1462.6,-90.55 -1399.61,-27.56 -1382.87,-44.29 -532.48,-44.29 -483.27,4.92 -38.39,449.8 -38.39,681.1 -38.39,938.98 -37.4,939.96 -73.82,976.38 -75.79,976.38 -75.79,1505.91 -371.06,1801.18 -402.56,1832.68 -1155.51,1832.68
NetAOUT2_1 on Bottom Layer "Top Layer-No Net" (solid, remove dead copper, pour order 94): -1835.63,1033.46 -1616.14,1033.46 -1571.85,1077.76 -1554.13,1095.47 -1554.13,1447.83 -1554.13,1463.58 -1630.91,1540.35 -1632.87,1542.32 -1902.56,1542.32 -1902.56,1535.43 -1945.87,1492.13 -1952.76,1485.24 -1952.76,1142.72

## Keep-outs
Keep-Out Layer:
  lines w10: -1969,1769 cw(c-1769,1769) -1769,1969 ; -1968.5,1772 -1968.5,-1769 ccw(c-1768.5,-1769) -1768.5,-1969 ; -1779,-1968.5 1779,-1968.5 ; -1769,1968.5 1774,1968.5 ; 1767,1969 cw(c1767,1769) 1967,1769 ; 1768,-1970 ccw(c1768,-1770) 1968,-1770 ; 1968.5,-1770 1968.5,1769

## Silkscreen, mask and mechanical layers (free items; w line width, h text height)
Top Overlay:
  text "OUT" at -150.59,-1809.06 h30
  text "GND" at -38.39,-1809.06 h30

## Text inside footprints (layer, text, board x,y; h text height)
C2: Top Overlay "1020" at -1312.8,1718.74 h30 r180
C3: Top Overlay "1020" at -68.02,1232.23 h30 r45
C4: Top Overlay "1020" at 761.02,1169.72 h30 r180
C5: Top Overlay "1020" at 1690.16,1021.89 h30 r180
C6: Top Overlay "1020" at 1193.66,-163.19 h30 r270
C7: Top Overlay "1020" at 1020.47,-1110.67 h30
C9: Top Overlay "1020" at 1774.41,82.44 h30
C10: Top Overlay "1020" at 1458.46,-1112.64 h30